# Altium PCB ClockPCB.PcbDoc (part 1 of 2)
Units mm, origin at the board's own origin, x right, y up, seen from the top; angles counter-clockwise.
Board outline 90 x 40 mm, 4 copper layers (Top Layer, L2, L3, Bottom Layer), stack 1.564 mm thick; 138 components, 106 nets, 450 pads, 188 vias.
Unrouted connection lines stored in the file: 60.
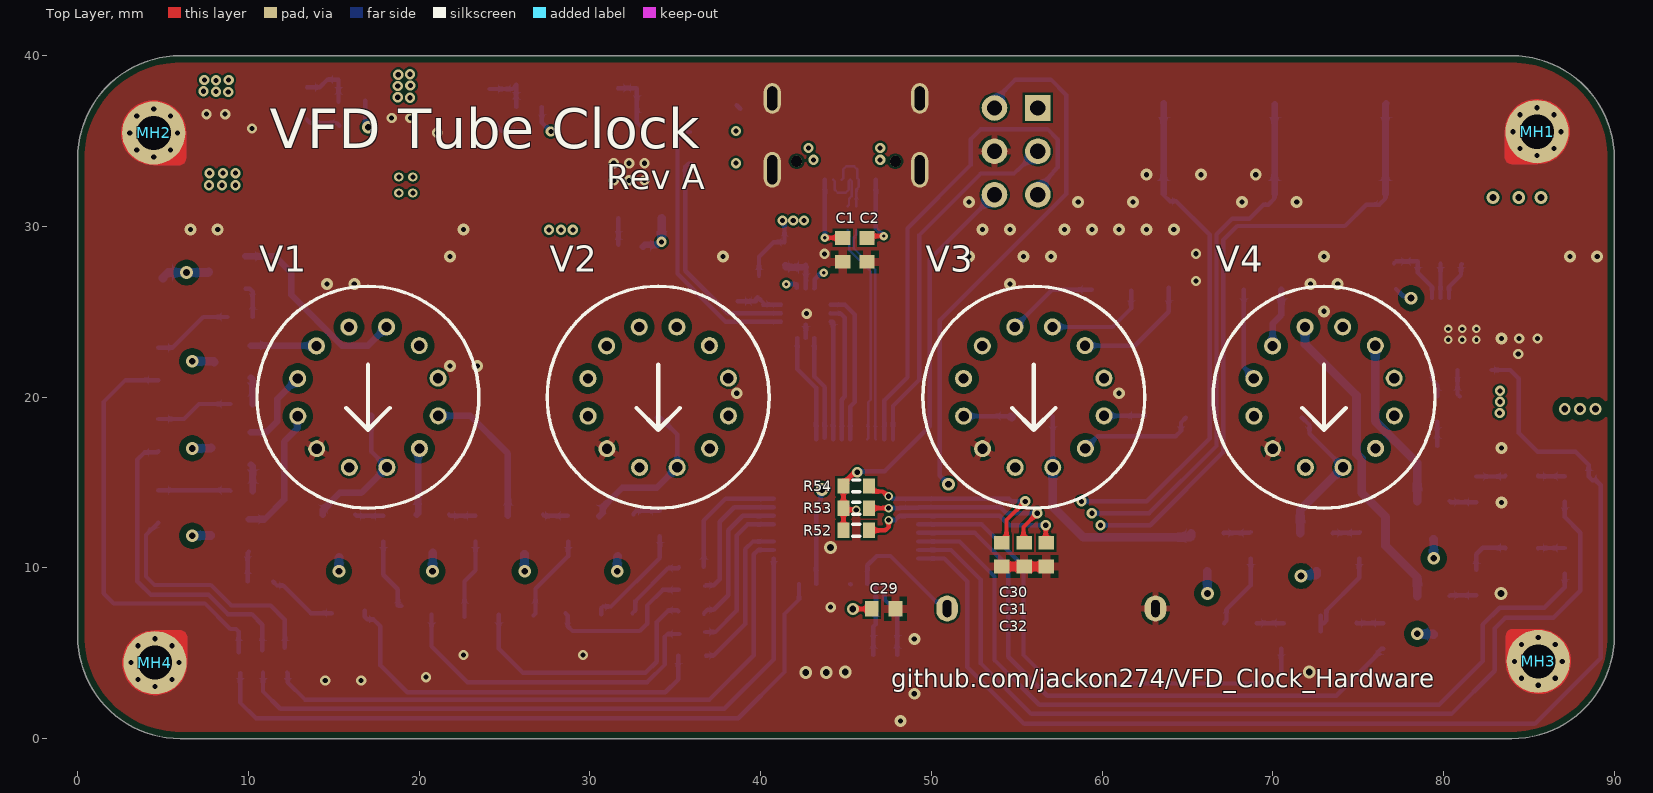
[diagram p0: Top Layer view]
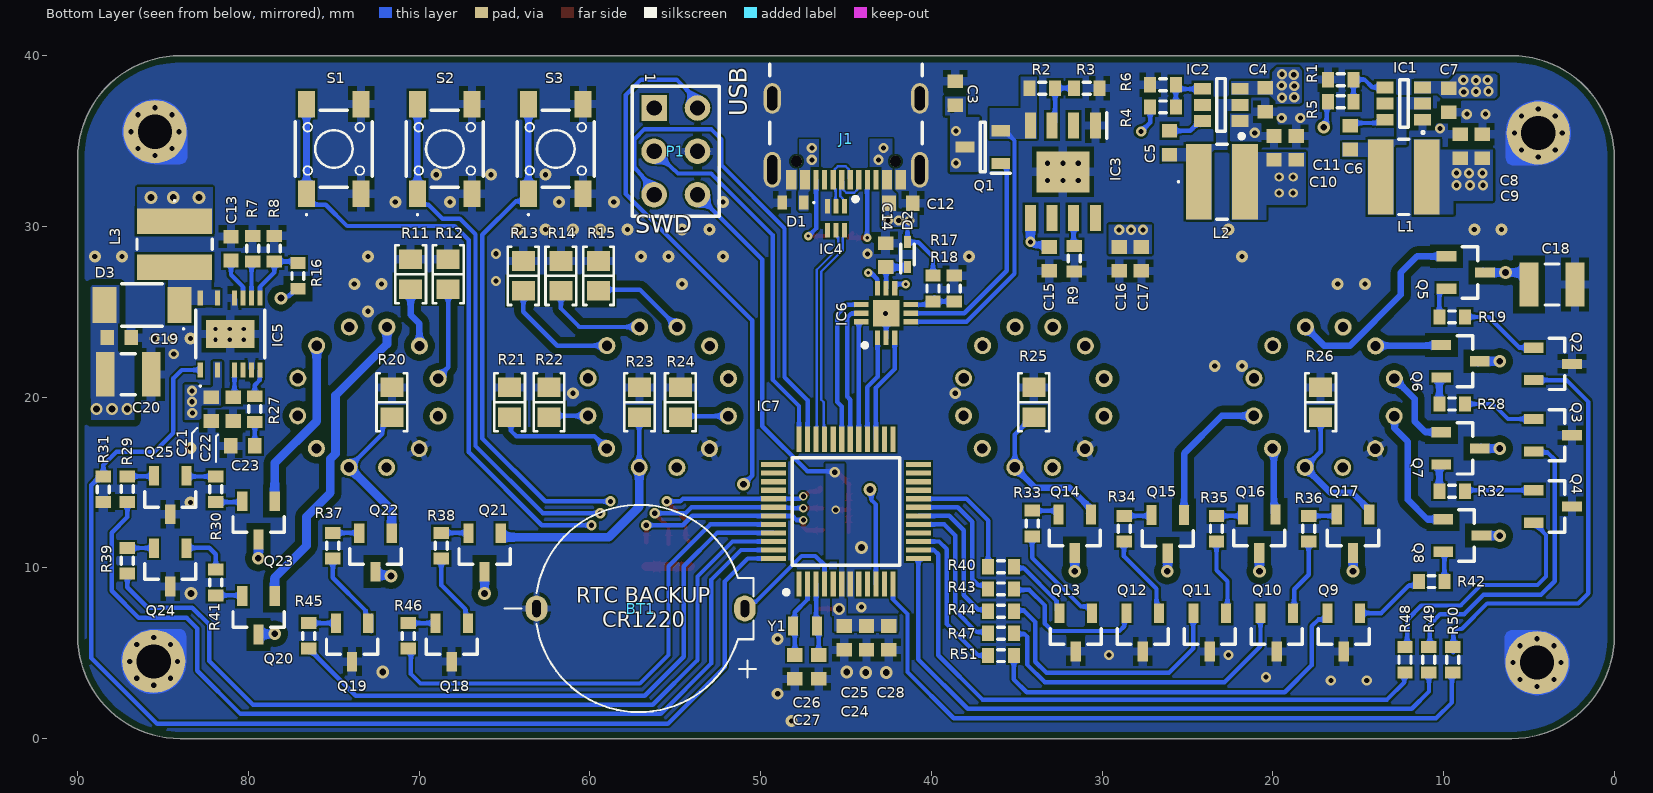
[diagram p1: Bottom Layer view, seen from below]
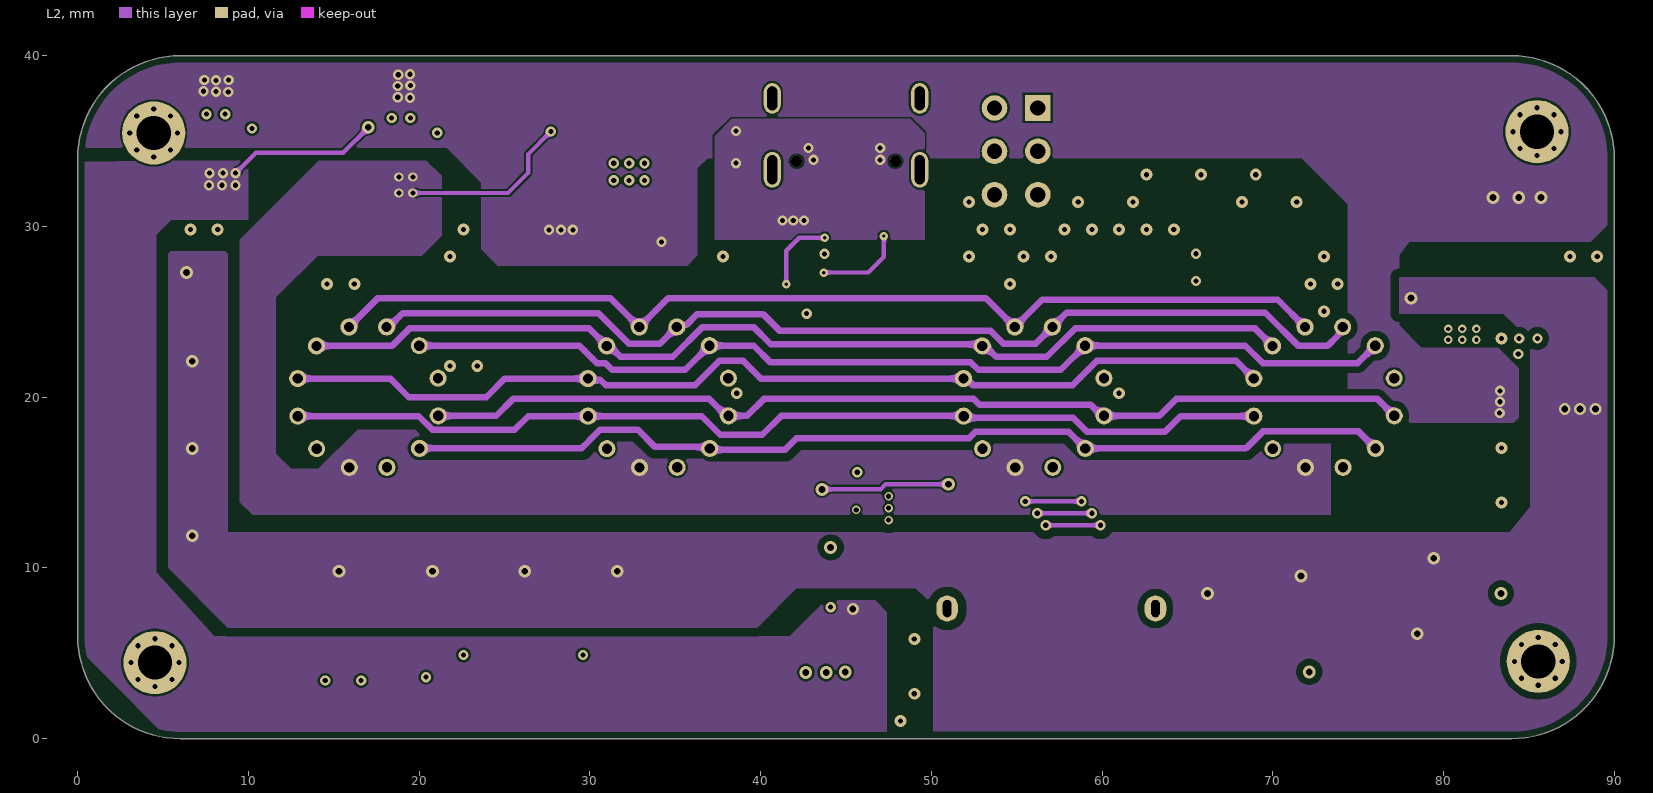
[diagram p2: L2]
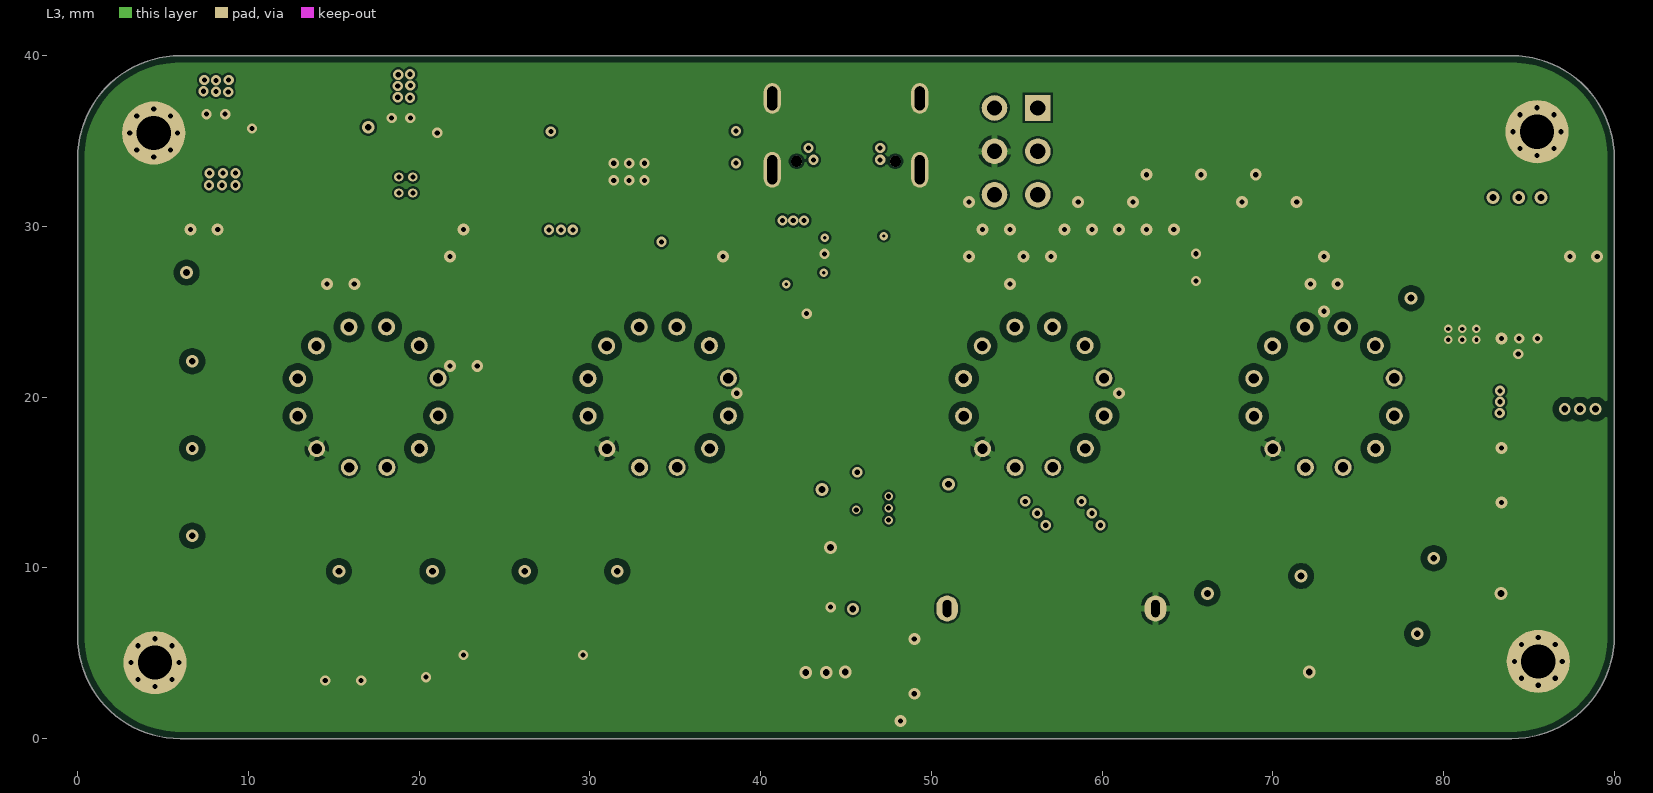
[diagram p3: L3]

## Layer stack, top to bottom
Top Solder: solder mask 0.0102, Solder Resist, Dk 3.8
Top Layer: signal copper 0.035
Dielectric 2: prepreg 0.0994, PP-006, Dk 4.1
L2: signal copper 0.0152
Dielectric 1: dielectric 1.265, FR-4, Dk 4.6
L3: signal copper 0.0152
Dielectric 3: prepreg 0.0994, PP-006, Dk 4.1
Bottom Layer: signal copper 0.035
Bottom Solder: solder mask 0.0102, Solder Resist, Dk 3.8

## Board outline
0,6 0,34 cw(c6,34) 6,40 84,40 cw(c84,34) 90,34 90,6 cw(c84,6) 84,0 6,0 cw(c6,6)

## Design rules (kind name [scope] priority, off if disabled: settings)
BoardOutlineClearance [All] p1: gap=0.254 ignorepadtopadclearanceinfootprint=FALSE except(0: Arc-SplitContinuation Track-SplitContinuation SMDPad-SplitContinuation THPad-SplitContinuation Via-SplitContinuation Fill-SplitContinuation Poly-SplitContinuation Region-SplitContinuation Text-SplitContinuation; 0.4: Poly-OutlineEdge)
Clearance HV_GND [InNet('+50V') vs InNet('GND')] p1: gap=0.381 ignorepadtopadclearanceinfootprint=TRUE except(0: Arc-Hole Track-Hole SMDPad-Hole THPad-Hole Via-Hole Fill-Hole Poly-Hole Region-Hole Text-Hole; 0.254: Arc-Text Track-Text SMDPad-Text THPad-Text Via-Text Fill-Text Poly-Text Region-Text Text-Text)
Clearance HV_to_PwrNets [InNet('Grid_1') Or InNet('Grid_2') Or InNet('Grid_3') Or InNet('Grid_4') Or InNet('Anode_A') Or InNet('Anode_B') Or InNet('Anode_C')  Or InNet('Anode_D') Or  InNet('Anode_E') Or InNet('Anode_F')  Or InNet('Anode_G') Or InNet('Anode_DP') vs InNet('+1V') Or InNet('+3V3')] p2: gap=0.508 ignorepadtopadclearanceinfootprint=TRUE except(0: Arc-Hole Track-Hole SMDPad-Hole THPad-Hole Via-Hole Fill-Hole Poly-Hole Region-Hole Text-Hole; 0.127: THPad-Fill THPad-Poly THPad-Region Via-Fill Via-Poly Via-Region Fill-Fill Fill-Poly Fill-Region Poly-Poly Poly-Region Region-Region; 0.254: Arc-Text Track-Text SMDPad-Text THPad-Text Via-Text Fill-Text Poly-Text Region-Text Text-Text)
Clearance HV_toAllTraces [InNet('+50V') vs Not InNet('+50V')] p3: gap=0.508 ignorepadtopadclearanceinfootprint=TRUE except(0: Arc-Hole Track-Hole SMDPad-Hole THPad-Hole Via-Hole Fill-Hole Poly-Hole Region-Hole Text-Hole; 0.254: Arc-Text Track-Text SMDPad-SMDPad SMDPad-Text THPad-Text Via-Text Fill-Text Poly-Text Region-Text Text-Text; 0.635: Arc-Arc Arc-Track Arc-SMDPad Arc-THPad Arc-Via Track-Track Track-SMDPad Track-THPad Track-Via SMDPad-THPad SMDPad-Via THPad-THPad THPad-Via Via-Via)
Clearance AnodeVoltage [InNet('Anode_A')   Or InNet('Anode_B')  Or InNet('Anode_C')  Or InNet('Anode_D')   Or InNet('Anode_E')  Or InNet('Anode_F')  Or InNet('Anode_G')   Or InNet('Anode_DP') vs Not (InNet('Anode_A')   Or InNet('Anode_B')  Or InNet('Anode_C')  Or InNet('Anode_D')   Or InNet('Anode_E')  Or InNet('Anode_F')  Or InNet('Anode_G')   Or InNet('Anode_DP')    )] p4: gap=0.381 ignorepadtopadclearanceinfootprint=TRUE except(0: Arc-Hole Track-Hole SMDPad-Hole THPad-Hole Via-Hole Fill-Hole Poly-Hole Region-Hole Text-Hole; 0.254: Arc-Text Track-Text SMDPad-Text THPad-THPad THPad-Text Via-Text Fill-Text Poly-Text Region-Text Text-Text; 0.305: Arc-THPad Track-THPad)
Clearance MCU [InComponent('IC7') vs IsTeardrop] p5: gap=0.178 ignorepadtopadclearanceinfootprint=TRUE
Clearance [All] p6: gap=0.127 ignorepadtopadclearanceinfootprint=TRUE except(0: Arc-Hole Track-Hole SMDPad-Hole THPad-Hole Via-Hole Fill-Hole Poly-Hole Region-Hole Text-Hole; 0.254: Arc-Text Track-Text SMDPad-Text THPad-Text Via-Text Fill-Text Poly-Text Region-Text Text-Text)
DiffPairsRouting USB_2 [InDifferentialPair('USB_MCU')] p1: maxlimit=0.127 minlimit=0.127 mostfreqgap=0.127 toplayer_minwidth=0.14 toplayer_maxwidth=0.14 toplayer_prefwidth=0.14 bottomlayer_minwidth=0.14 bottomlayer_maxwidth=0.14 bottomlayer_prefwidth=0.14 impedanceprofiledriven=TRUE impedanceprofileid={8D7F8B74-E079-47DF-BA4C-9728C9DC5000} impedanceprofilevalue=90.000000 maxuncoupledlength=12.7
DiffPairsRouting USB_1 [InDifferentialPair('USB')] p2: maxlimit=0.127 minlimit=0.127 mostfreqgap=0.127 toplayer_minwidth=0.14 toplayer_maxwidth=0.14 toplayer_prefwidth=0.14 bottomlayer_minwidth=0.14 bottomlayer_maxwidth=0.14 bottomlayer_prefwidth=0.14 impedanceprofiledriven=TRUE impedanceprofileid={8D7F8B74-E079-47DF-BA4C-9728C9DC5000} impedanceprofilevalue=90.000000 maxuncoupledlength=12.7
Height [All] p1: minheight=0 maxheight=70 prefheight=12.7
HoleToHoleClearance MountingHoles [InComponent('MH1') Or InComponent('MH2') Or InComponent('MH3') Or InComponent('MH4')] p1: gap=0.203 allowstackedmicrovias=TRUE
HoleToHoleClearance [All] p2: gap=0.254 allowstackedmicrovias=TRUE
MinimumSolderMaskSliver [All] p1: minsoldermaskwidth=0.13
PolygonConnect GND_MountingHole [InNet('GND') And ( InComponent('MH1') Or  InComponent('MH2') Or  InComponent('MH3') Or InComponent('MH4') )] p1: connectstyle=Direct reliefconductorwidth=0.254 reliefentries=4 polygonreliefangle="90 Angle" airgapwidth=0.254
PolygonConnect GND_USB_Connector [InNet('GND') And InComponent('J1')] p2: connectstyle=Direct reliefconductorwidth=0.254 reliefentries=4 polygonreliefangle="90 Angle" airgapwidth=0.254
PolygonConnect GND_Via [All vs IsVia And InNet('GND')] p3: connectstyle=Direct reliefconductorwidth=0.254 reliefentries=4 polygonreliefangle="90 Angle" airgapwidth=0.254
PolygonConnect InternalPowerConnect [IsNamedPolygon('L2_VBUS') Or IsNamedPolygon('L2_50V') or IsNamedPolygon('L2_3V3') Or IsNamedPolygon('L2_VBUS_C') Or IsNamedPolygon('L2_1V') Or IsNamedPolygon('L2_VBUS_RAW')] p4: connectstyle=Direct reliefconductorwidth=0.254 reliefentries=4 polygonreliefangle="90 Angle" airgapwidth=0.254
PolygonConnect Power_DirectINConnect [IsNamedPolygon('L4_3V3_Buck_IN') Or   IsNamedPolygon('L4_1V_Buck_IN')      Or   IsNamedPolygon('L4_50V_Boost_IN')    Or  IsNamedPolygon('L4_USB_BUS_VOLTAGE') Or  IsNamedPolygon('L4_USB_C_PWR_1')     Or  IsNamedPolygon('L4_USB_C_PWR_2')     Or  IsNamedPolygon('L4_MOSFET_VBUS')     Or IsNamedPolygon('L4_VBUS_CAP')        Or IsNamedPolygon('L1_SwitchPullup_3V3') Or IsNamedPolygon('L4_3V3_MCU')] p5: connectstyle=Direct reliefconductorwidth=0.254 reliefentries=4 polygonreliefangle="90 Angle" airgapwidth=0.254
PolygonConnect Power_DirectGNDConnect [((IsPad) And InNet('GND') And (InComponent('IC2') Or InComponent('IC4')) ) Or (InComponentClass('SMPS_InputCap') And InNet('GND')) Or (InComponentClass('SMPS_OutputCap') And InNet('GND'))   Or ((IsPad) And InNet('GND') And (InComponent('IC7')) )] p6: connectstyle=Direct reliefconductorwidth=0.254 reliefentries=4 polygonreliefangle="90 Angle" airgapwidth=0.254
PolygonConnect GNDConnect [InNet('GND')] p7: thpad.connectstyle=Relief thpad.reliefconductorwidth=0.381 thpad.reliefentries=4 thpad.polygonreliefangle="90 Angle" thpad.airgapwidth=0.203 smdpad.connectstyle=Relief smdpad.reliefconductorwidth=0.508 smdpad.reliefentries=4 smdpad.polygonreliefangle="90 Angle" smdpad.airgapwidth=0.254 via.connectstyle=Relief via.reliefconductorwidth=0.254 via.reliefentries=4 via.polygonreliefangle="90 Angle" via.airgapwidth=0.254
PolygonConnect SMPS_HotSwitchingPolygon [IsNamedPolygon('SMPS_SWITCHING') Or IsNamedPolygon('SMPS_OUT_50V') Or IsNamedPolygon('SMPS_VBUS_INDUCTOR') Or IsNamedPolygon('L4_3V3_Buck_SW') Or IsNamedPolygon('L4_3V3_Buck_OUT') Or IsNamedPolygon('L4_1V_Buck_SW') Or IsNamedPolygon('L4_1V_Buck_OUT')] p8: connectstyle=Direct reliefconductorwidth=0.254 reliefentries=4 polygonreliefangle="90 Angle" airgapwidth=0.254
PolygonConnect PowerSupplyPolygn [InNet('+1V') or InNet('NetC16_2') or InNet('NetC7_1') or InNet('+3V3')] p9: thpad.connectstyle=Relief thpad.reliefconductorwidth=0.635 thpad.reliefentries=4 thpad.polygonreliefangle="90 Angle" thpad.airgapwidth=0.152 smdpad.connectstyle=Relief smdpad.reliefconductorwidth=0.381 smdpad.reliefentries=4 smdpad.polygonreliefangle="90 Angle" smdpad.airgapwidth=0.254 via.connectstyle=Relief via.reliefconductorwidth=0.254 via.reliefentries=4 via.polygonreliefangle="90 Angle" via.airgapwidth=0.254
PolygonConnect [All] p10: connectstyle=Relief reliefconductorwidth=0.254 reliefentries=4 polygonreliefangle="90 Angle" airgapwidth=0.203
RoutingVias [All] p1: holewidth=0.711 width=1.27 viastyle="Through Hole" minholewidth=0.711 minwidth=1.27 maxholewidth=0.711 maxwidth=1.27
SilkToSilkClearance [All] p1: silktosilkclearance=0.2
SolderMaskExpansion [All] p1: expansion=0.102 istentingtop=FALSE
Width USB [InNet('USB_N') Or InNet('USB_P')] p1: maxlimit=0.254 minlimit=0.127 preferedwidth=0.254 midlayer1_minwidth=0.254 midlayer2_minwidth=0.254 minimp=50.000000 maximp=50.000000 favimp=50.000000
Width RoomWidth [OnLayer('Bottom Layer') And ( WithinRoom('MCURoom') or WithinRoom('RoomECMF') or WithinRoom('RoomUSBPort') or WithinRoom('RoomTCPP') )] p2: maxlimit=0.508 minlimit=0.127 preferedwidth=0.127 midlayer1_maxwidth=0.381 midlayer2_maxwidth=0.381 minimp=50.000000 maximp=50.000000 favimp=50.000000
Width [All] p3: maxlimit=0.508 minlimit=0.254 preferedwidth=0.381 midlayer2_maxwidth=0.254 midlayer2_prefwidth=0.254 minimp=50.000000 maximp=50.000000 favimp=50.000000
25 further rules are at their usual default settings.

## Classes and differential pairs
component class U_USB: C1 C2 C3 C12 C14 D1 D2 IC4 IC6 J1 Q1 R17 R18
component class U_Tubes: Q2 Q3 Q4 Q5 Q6 Q7 Q8 Q9 Q10 Q11 Q12 Q13 Q14 Q15 Q16 Q17 Q18 Q19 Q20 Q21 Q22 Q23 Q24 Q25 R11 R12 R13 R14 R15 R19 R20 R21 R22 R23 R24 R25 R26 R28 R29 R30 R32 R33 R34 R35 R36 R37 R38 R39 R40 R41 R42 R43 R44 R45 R46 R47 R48 R49 R50 R51 V1 V2 V3 V4
component class U_power: BT1 C4 C5 C6 C7 C8 C9 C10 C11 C13 C15 C16 C17 C18 C19 C20 C21 C22 C23 D3 IC1 IC2 IC3 IC5 L1 L2 L3 R1 R2 R3 R4 R5 R6 R7 R8 R9 R16 R27 R31
net class USB: USB_N USB_P
component class main: C24 C25 C26 C27 C28 C29 C30 C31 C32 IC7 MH1 MH2 MH3 MH4 P1 R52 R53 R54 S1 S2 S3 Y1
differential pair USB_MCU: +USB_MCU_P -USB_MCU_N
differential pair USB: +USB_P -USB_N

## Components (designator, comment, footprint, x,y, rotation, side; value= is the part's Value field where it differs from the comment)
BT1 "120591-1" BR1220_Horizontal 57.127,7.62 r0 bottom
C1 "330pF" 1608[0603] 44.806,28.626 r90 top (schematic designator C26)
C2 "330pF" 1608[0603] 46.228,28.626 r90 top (schematic designator C27)
C3 "1u" 1608[0603] 38.6,37.8 r270 bottom value=100pF (schematic designator C23)
C4 "100n" 1608[0603] 20.447,37.414 r90 bottom value=100pF (schematic designator C19)
C5 "100n" 1608[0603] 26.052,34.9 r270 bottom value=100pF (schematic designator C16)
C6 "100n" 1608[0603] 15.469,35.204 r270 bottom value=100pF (schematic designator C7)
C7 "100n" 1608[0603] 9.703,37.389 r90 bottom value=100pF (schematic designator C8)
C8 "100n" 1608[0603] 9.027,34.7 r270 bottom value=100pF (schematic designator C9)
C9 "10u" 1608[0603] 7.727,34.7 r270 bottom value=100pF (schematic designator C10)
C10 "10u" 1608[0603] 19.933,34.6 r270 bottom value=100pF (schematic designator C21)
C11 "100n" 1608[0603] 18.633,34.6 r270 bottom value=100pF (schematic designator C20)
C12 "100n" 1608[0603] 41.783,31.369 r0 bottom value=100pF (schematic designator C22)
C13 "10nF" 1608[0603] 81.026,28.702 r270 bottom value=100pF (schematic designator C17)
C14 "100nF 50V X7R" 1608[0603] 42.672,28.321 r270 bottom value=100nF (schematic designator C32)
C15 "100n" 1608[0603] 33.1,28.1 r90 bottom value=100pF (schematic designator C28)
C16 "22u" 1608[0603] 29,28.1 r90 bottom value=100pF (schematic designator C30)
C17 "10u" 1608[0603] 27.7,28.1 r90 bottom value=100pF (schematic designator C29)
C18 "2.2u" C1210 3.65,26.6 r0 bottom value=100pF (schematic designator C13)
C19 "68n" 1608[0603] 87.568,23.495 r0 bottom value=100pF (schematic designator C12)
C20 "2.2u" C1210 87.042,21.336 r0 bottom value=100pF (schematic designator C14)
C21 "4.7u" 1608[0603] 82.169,19.304 r90 bottom value=100pF (schematic designator C11)
C22 "1uF" 1608[0603] 80.899,19.304 r90 bottom value=100pF (schematic designator C15)
C23 "2.2nF" 1608[0603] 80.329,17.145 r180 bottom value=100pF (schematic designator C18)
C24 "100n" 1608[0603] 45.1,5.9 r90 bottom value=100pF (schematic designator C3)
C25 "10u" 1608[0603] 43.8,5.9 r90 bottom value=100pF (schematic designator C6)
C26 "15pF" 1608[0603] 48,4.2 r90 bottom value=100pF (schematic designator C1)
C27 "15pF" 1608[0603] 46.6,4.2 r90 bottom value=100pF (schematic designator C2)
C28 "100n" 1608[0603] 42.5,5.9 r90 bottom value=100pF
C29 "47u" 1608[0603] 47.2,7.6 r180 top value=100pF
C30 "100n" 1608[0603] 56.732,10.78 r90 top value=100pF
C31 "100n" 1608[0603] 55.432,10.78 r90 top value=100pF
C32 "100n" 1608[0603] 54.132,10.78 r90 top value=100pF
D1 "ESDA25P35" ESDA25P351U1M 48.1,31.4 r180 bottom (schematic designator D2)
D2 "BAT54KFILM" SODFL1608X70N 41.402,28.358 r90 bottom (schematic designator D3)
D3 "PMEG6030EP" PMEG6030EP115 86.233,25.4 r0 bottom (schematic designator D1)
IC1 "AP62250WU-7" TSOT26 12.327,37.2 r0 bottom (schematic designator IC2)
IC2 "AP62250WU-7" TSOT26 23.029,37.114 r0 bottom (schematic designator IC4)
IC3 "TPS259620DDAR" SOIC127P600X170-9N 32.3,33.2 r270 bottom (schematic designator IC5)
IC4 "ECMF02-2AMX6" SON50P150X170X55-6N-D 45.593,30.48 r270 bottom (schematic designator IC6)
IC5 "LT8364EMSE" LT8364EMSEPBF 81.058,23.702 r180 bottom (schematic designator IC3)
IC6 "TCPP01-M12" QFN50P300X300X100-13N-D 42.647,24.917 r90 bottom (schematic designator IC7)
IC7 "STM32G0B1CBT6" QFP50P900X900X160-48N 45,13.3 r90 bottom (schematic designator IC1)
J1 "USB4105-GF-A" GCT_USB4105-GF-A 45,37.5 r0 bottom
L1 "2.2u" BWVS004040182R2M00 12.327,32.9 r270 bottom value=10mH
L2 "1u" BWVS004040182R2M00 22.979,32.618 r270 bottom value=10mH (schematic designator L3)
L3 "3.3uH" BWVS004040182R2M00 84.328,28.956 r0 bottom (schematic designator L2)
MH1 "HOLE 2mm" Hole 85.5,35.5 r0 top locked (schematic designator MH3)
MH2 "HOLE 2mm" Hole 4.5,35.5 r90 top locked
MH3 "HOLE 2mm" Hole 85.5,4.5 r270 top locked (schematic designator MH4)
MH4 "HOLE 2mm" Hole 4.5,4.5 r180 top locked (schematic designator MH1)
P1 "Header 3X2" HDR2X3 56.24,36.94 r270 bottom
Q1 "DMG6968UQ-7" SOT96P240X110-3N 36.982,34.646 r0 bottom (schematic designator Q25)
Q2 "MMBTA42" SOT-23_N 3.6,21.95 r180 bottom (schematic designator Q6)
Q3 "MMBTA42" SOT-23_N 3.6,17.775 r180 bottom (schematic designator Q15)
Q4 "MMBTA42" SOT-23_N 3.6,13.6 r180 bottom (schematic designator Q10)
Q5 "MMBTA92" SOT-23B_N 8.7,27.3 r180 bottom (schematic designator Q1)
Q6 "MMBTA92" SOT-23B_N 9,22.1 r180 bottom (schematic designator Q11)
Q7 "MMBTA92" SOT-23B_N 9,17 r180 bottom (schematic designator Q5)
Q8 "MMBTA92" SOT-23B_N 8.9,11.9 r180 bottom (schematic designator Q4)
Q9 "MMBTA42" SOT-23_N 15.841,6.226 r270 bottom
Q10 "MMBTA42" SOT-23_N 19.766,6.226 r270 bottom (schematic designator Q22)
Q11 "MMBTA42" SOT-23_N 23.691,6.226 r270 bottom (schematic designator Q8)
Q12 "MMBTA42" SOT-23_N 27.616,6.226 r270 bottom (schematic designator Q17)
Q13 "MMBTA42" SOT-23_N 31.541,6.226 r270 bottom (schematic designator Q23)
Q14 "MMBTA92" SOT-23B_N 31.6,12 r270 bottom (schematic designator Q20)
Q15 "MMBTA92" SOT-23B_N 26.15,11.975 r270 bottom (schematic designator Q13)
Q16 "MMBTA92" SOT-23B_N 20.8,12 r270 bottom (schematic designator Q3)
Q17 "MMBTA92" SOT-23B_N 15.3,12 r270 bottom (schematic designator Q19)
Q18 "MMBTA42" SOT-23_N 68.097,5.636 r270 bottom (schematic designator Q24)
Q19 "MMBTA42" SOT-23_N 73.927,5.636 r270 bottom (schematic designator Q18)
Q20 "MMBTA92" SOT-23B_N 79.407,7.226 r270 bottom (schematic designator Q12)
Q21 "MMBTA92" SOT-23B_N 66.167,10.91 r270 bottom
Q22 "MMBTA92" SOT-23B_N 72.561,10.91 r270 bottom (schematic designator Q14)
Q23 "MMBTA92" SOT-23B_N 79.407,12.79 r270 bottom (schematic designator Q2)
Q24 "MMBTA42" SOT-23_N 84.582,10.033 r270 bottom (schematic designator Q16)
Q25 "MMBTA42" SOT-23_N 84.582,14.264 r270 bottom (schematic designator Q7)
R1 "10k" J1-0603 16.027,38.6 r180 bottom value=1K (schematic designator R38)
R2 "160k" J1-0603 33.5,38.1 r0 bottom value=1K (schematic designator R46)
R3 "68k" J1-0603 30.9,38.1 r0 bottom value=1K (schematic designator R49)
R4 "2k5" J1-0603 26.433,37 r0 bottom value=1K (schematic designator R44)
R5 "31k6" J1-0603 16.027,37.3 r0 bottom value=1K (schematic designator R37)
R6 "10k" J1-0603 26.433,38.3 r180 bottom value=1K (schematic designator R45)
R7 "20k" J1-0603 79.756,28.702 r270 bottom value=1K (schematic designator R43)
R8 "34.8k" J1-0603 78.486,28.702 r270 bottom value=1K (schematic designator R40)
R9 "???" J1-0603 31.623,28.118 r90 bottom value=1K (schematic designator R51)
R11 "330k" "RES 0805_2012" 70.5,27.2 r270 bottom value=1K (schematic designator R16)
R12 "330k" "RES 0805_2012" 68.3,27.2 r270 bottom value=1K (schematic designator R5)
R13 "330k" "RES 0805_2012" 63.9,27.1 r270 bottom value=1K (schematic designator R2)
R14 "330k" "RES 0805_2012" 61.7,27.1 r270 bottom value=1K (schematic designator R1)
R15 "330k" "RES 0805_2012" 59.5,27.1 r270 bottom value=1K (schematic designator R17)
R16 "1M" J1-0603 77.1,27.1 r270 bottom value=1K (schematic designator R39)
R17 "10k" J1-0603 39.903,26.365 r90 bottom value=1K (schematic designator R47)
R18 "1.1k" J1-0603 38.659,26.365 r270 bottom value=1K (schematic designator R48)
R19 "100k" J1-0603 9.5,24.7 r0 bottom value=1K (schematic designator R6)
R20 "330k" "RES 0805_2012" 71.6,19.7 r270 bottom value=1K (schematic designator R19)
R21 "330k" "RES 0805_2012" 64.7,19.7 r270 bottom value=1K (schematic designator R3)
R22 "330k" "RES 0805_2012" 62.4,19.7 r270 bottom value=1K (schematic designator R18)
R23 "330k" "RES 0805_2012" 57.1,19.7 r270 bottom value=1K (schematic designator R30)
R24 "330k" "RES 0805_2012" 54.7,19.7 r270 bottom value=1K (schematic designator R4)
R25 "330k" "RES 0805_2012" 34,19.7 r270 bottom value=1K (schematic designator R29)
R26 "330k" "RES 0805_2012" 17.2,19.7 r270 bottom value=1K (schematic designator R28)
R27 "36.5k" J1-0603 79.629,19.304 r90 bottom value=1K (schematic designator R42)
R28 "100k" J1-0603 9.5,19.6 r0 bottom value=1K (schematic designator R20)
R29 "100k" J1-0603 87.095,14.617 r90 bottom value=1K (schematic designator R12)
R30 "100k" J1-0603 81.915,14.605 r270 bottom value=1K (schematic designator R7)
R31 "10k" J1-0603 88.5,14.6 r90 bottom value=1K (schematic designator R41)
R32 "100k" J1-0603 9.5,14.5 r0 bottom value=1K (schematic designator R10)
R33 "100k" J1-0603 34.1,12.6 r90 bottom value=1K (schematic designator R32)
R34 "100k" J1-0603 28.7,12.3 r90 bottom value=1K (schematic designator R22)
R35 "100k" J1-0603 23.3,12.3 r90 bottom value=1K (schematic designator R8)
R36 "100k" J1-0603 17.9,12.3 r90 bottom value=1K (schematic designator R31)
R37 "100k" J1-0603 75.057,11.303 r90 bottom value=1K (schematic designator R23)
R38 "100k" J1-0603 68.707,11.303 r90 bottom value=1K (schematic designator R33)
R39 "100k" J1-0603 87.095,10.414 r90 bottom value=1K (schematic designator R25)
R40 "100k" J1-0603 35.921,10.068 r180 bottom value=1K (schematic designator R35)
R41 "100k" J1-0603 81.915,9.144 r270 bottom value=1K (schematic designator R21)
R42 "100k" J1-0603 10.7,9.2 r180 bottom value=1K (schematic designator R9)
R43 "100k" J1-0603 35.921,8.768 r180 bottom value=1K (schematic designator R26)
R44 "100k" J1-0603 35.921,7.468 r180 bottom value=1K (schematic designator R13)
R45 "100k" J1-0603 76.467,6.017 r90 bottom value=1K (schematic designator R27)
R46 "100k" J1-0603 70.637,6.017 r90 bottom value=1K (schematic designator R36)
R47 "100k" J1-0603 35.921,6.168 r180 bottom value=1K (schematic designator R34)
R48 "100k" J1-0603 12.257,4.626 r90 bottom value=1K (schematic designator R15)
R49 "100k" J1-0603 10.857,4.626 r90 bottom value=1K (schematic designator R24)
R50 "100k" J1-0603 9.457,4.626 r90 bottom value=1K (schematic designator R11)
R51 "100k" J1-0603 35.921,4.868 r180 bottom value=1K (schematic designator R14)
R52 "10k" J1-0603 45.6,12.2 r180 top value=1K
R53 "10k" J1-0603 45.6,13.5 r180 top value=1K
R54 "10k" J1-0603 45.6,14.8 r180 top value=1K
S1 "PTS647SK70SMTR2N_LFS" PTS647SK70SMTR2NLFS 75,34.544 r90 bottom
S2 "PTS647SK70SMTR2N_LFS" PTS647SK70SMTR2NLFS 68.5,34.544 r90 bottom
S3 "PTS647SK70SMTR2N_LFS" PTS647SK70SMTR2NLFS 62,34.544 r90 bottom
V1 "IV-6" IV-6 17,20 r0 top
V2 "IV-6" IV-6 34,20 r0 top
V3 "IV-6" IV-6 56,20 r0 top
V4 "IV-6" IV-6 73,20 r0 top
Y1 "32.768kHz" ABS06N32768kHzT 47.4,6.6 r180 bottom

## Footprints (in the part's own frame and the unit in brackets; to place one, negate y for a bottom-side part, rotate by r counter-clockwise, add the part's x,y. Pads: shape width x height; smd on the part's side, far side on the other; paste and mask are expansions set on the pad)
1608[0603] [mm] "Chip Capacitor, Body 1.6x0.8mm, IPC High Density"
  rect 0.8x0.9 smd: 1(-0.7,0) 2(0.7,0)
  body extent -0.87,-0.48 0.87,0.48, height 1.3
ABS06N32768kHzT [mm]
  rect 0.6x1.1 smd: 1(-0.7,0) 2(0.7,0)
  body extent -1,-0.61 0.99,0.6, height 0.61
BR1220_Horizontal [mm]
  rrect100% 1.27x1.524 hole 1 slot 0.5 at 0 deg paste-1.524 mask+0: 1(6,0) 2(-6.2,0)
  silkscreen extent -6.85,-6.08 7.87,6.07
BWVS004040182R2M00 [mm]
  rect 4.4x1.5 smd: 1(0,-1.35) 2(0,1.35)
  silkscreen extent -2.2,-0.3 2.2,0.3, body extent -2,-2 2,2, height 2.1
C1210 [mm] "Chip Capacitor, Body 3.2x2.5mm, IPC High Density"
  rect 1.1x2.6 smd: 1(-1.35,0) 2(1.35,0)
  silkscreen extent -0.4,-1.2 0.4,1.2, body extent -1.7,-1.35 1.7,1.35, height 1.3
ESDA25P351U1M [mm]
  rect 0.55x0.8 smd: 1(0.625,0) 2(-0.625,0)
  silkscreen extent 1.17,-0.05 1.27,0.05, body extent -0.8,-0.5 0.8,0.5, height 0.57
GCT_USB4105-GF-A [mm]
  rect 0.6x1.15 smd mask+0.05: A1_B12(-3.2,4.755) A4_B9(-2.4,4.755) B1_A12(3.2,4.755) B4_A9(2.4,4.755)
  rect 0.3x1.15 smd mask+0.05: A5(-1.25,4.755) A6(-0.25,4.755) A7(0.25,4.755) A8(1.25,4.755) B5(1.75,4.755) B6(0.75,4.755) B7(-0.75,4.755) B8(-1.75,4.755)
  oval 1x2.1 hole 0.6 slot 1.7 at 90 deg: SH1(-4.32,4.18) SH2(4.32,4.18)
  oval 1x1.8 hole 0.6 slot 1.4 at 90 deg: SH3(-4.32,0) SH4(4.32,0)
  round 0.65 hole 0.65 unplated: ""(-2.89,3.68) ""(2.89,3.68)
  silkscreen extent -4.47,-2 4.47,2.65, body extent -4.47,-2.6 4.47,5.11, height 3.31
HDR2X3 [mm] "Connector; Header; 3x2 Position"
  rect 1.5x1.5 hole 0.9: 1(0,0)
  round 1.5 hole 0.9: 2(0,2.54) 3(2.54,0) 4(2.54,2.54) 5(5.08,0) 6(5.08,2.54)
  silkscreen extent -1.27,-1.27 6.35,3.81
Hole [mm]
  round 3.7 hole 2: 0(-0.025,0.05)
  Top Layer region: -1.913,0.054 -1.706,0.917 -1.13,1.591 -0.31,1.931 0.574,1.861 1.33,1.398 1.794,0.641 1.863,-0.243 1.524,-1.063 0.849,-1.639 -0.013,-1.846 -0.013,-1.846 -1.513,-1.846 -1.666,-1.815 -1.796,-1.729 -1.883,-1.599 -1.913,-1.446 -1.913,-1.446
  Bottom Layer region: -1.913,0.054 -1.706,0.917 -1.13,1.591 -0.31,1.931 0.574,1.861 1.33,1.398 1.794,0.641 1.863,-0.243 1.524,-1.063 0.849,-1.639 -0.013,-1.846 -0.013,-1.846 -1.513,-1.846 -1.666,-1.815 -1.796,-1.729 -1.883,-1.599 -1.913,-1.446 -1.913,-1.446
IV-6 [mm] "Vacuum Tube; 9 Leads"
  round 1 hole 0.6: 1(3.003,3.017) 2(1.092,4.115) 3(-1.112,4.11) 4(-3.017,3.003) 5(-4.115,1.092) 6(-4.11,-1.112) 7(-3.003,-3.017) 8(-1.092,-4.115) 9(1.112,-4.11) 10(3.017,-3.003) 11(4.115,-1.092) 12(4.11,1.112)
  silkscreen extent -6.5,-6.5 6.5,6.5
J1-0603 [mm] "Chip Resistor, Body 1.6x0.8mm, IPC High Density"
  rect 0.7x0.9 smd: 1(-0.75,0) 2(0.75,0)
  silkscreen extent -0.2,-0.35 0.2,0.35, body extent -0.85,-0.48 0.85,0.48, height 0.9
LT8364EMSEPBF [mm]
  rect 0.305x0.889 smd: 1(-1.761,-2.107) 3(-0.761,-2.107) 5(0.239,-2.107) 6(0.739,-2.107) 7(1.239,-2.107) 8(1.739,-2.107) 9(1.739,2.107) 10(1.239,2.107) 11(0.739,2.107) 12(0.239,2.107) 14(-0.761,2.107) 16(-1.761,2.107)
  rect 2.845x1.651 smd: 17(-0.011,0)
  silkscreen extent -2.02,-3.1 2.02,1.4
PMEG6030EP115 [mm]
  rect 1.4x2.1 smd: 1(-2.2,0) 2(2.2,0)
  silkscreen extent -2.48,-1.25 1.2,1.45, body extent -2.35,-1.3 2.35,1.3, height 1.07
PTS647SK70SMTR2NLFS [mm]
  rect 1.55x1 smd: 1(-2.625,1.6) 1(2.625,1.6) 4(-2.625,-1.6) 4(2.625,-1.6)
  silkscreen extent -3.9,-2.25 2.25,2.25, body extent -3.25,-2.25 3.25,2.25, height 7
QFN50P300X300X100-13N-D [mm]
  rect 0.85x0.3 smd: 1(-1.45,0.5) 2(-1.45,0) 3(-1.45,-0.5) 7(1.45,-0.5) 8(1.45,0) 9(1.45,0.5)
  rect 0.3x0.85 smd: 4(-0.5,-1.45) 5(0,-1.45) 6(0.5,-1.45) 10(0.5,1.45) 11(0,1.45) 12(-0.5,1.45)
  rect 1.55x1.55 smd: 13(0,0)
  silkscreen extent -2,1.13 -1.75,1.38, body extent -1.55,-1.55 1.55,1.55, height 1
QFP50P900X900X160-48N [mm]
  rect 1.475x0.3 smd: 1(-4.238,2.75) 2(-4.238,2.25) 3(-4.238,1.75) 4(-4.238,1.25) 5(-4.238,0.75) 6(-4.238,0.25) 7(-4.238,-0.25) 8(-4.238,-0.75) 9(-4.238,-1.25) 10(-4.238,-1.75) 11(-4.238,-2.25) 12(-4.238,-2.75) 25(4.238,-2.75) 26(4.238,-2.25) 27(4.238,-1.75) 28(4.238,-1.25) 29(4.238,-0.75) 30(4.238,-0.25) 31(4.238,0.25) 32(4.238,0.75) 33(4.238,1.25) 34(4.238,1.75) 35(4.238,2.25) 36(4.238,2.75)
  rect 0.3x1.475 smd: 13(-2.75,-4.238) 14(-2.25,-4.238) 15(-1.75,-4.238) 16(-1.25,-4.238) 17(-0.75,-4.238) 18(-0.25,-4.238) 19(0.25,-4.238) 20(0.75,-4.238) 21(1.25,-4.238) 22(1.75,-4.238) 23(2.25,-4.238) 24(2.75,-4.238) 37(2.75,4.238) 38(2.25,4.238) 39(1.75,4.238) 40(1.25,4.238) 41(0.75,4.238) 42(0.25,4.238) 43(-0.25,4.238) 44(-0.75,4.238) 45(-1.25,4.238) 46(-1.75,4.238) 47(-2.25,4.238) 48(-2.75,4.238)
  silkscreen extent -4.85,-3.15 3.15,3.63, body extent -4.5,-4.5 4.5,4.5, height 1.6
"RES 0805_2012" [mm] "Chip Resistor, 2-Leads, Body 2.00x1.25mm, IPC Medium Density"
  rect 1.15x1.35 smd: 1(-0.875,0) 2(0.875,0)
  silkscreen extent -1.7,-0.9 1.7,0.9, body extent -1,-0.62 1,0.63, height 0.6
SODFL1608X70N [mm]
  rect 0.7x0.42 smd: 1(-0.725,0) 2(0.725,0)
  silkscreen extent -1.07,-0.4 0.6,0.4, body extent -0.8,-0.4 0.8,0.4, height 0.7
SOIC127P600X170-9N [mm]
  rect 1.525x0.65 smd: 1(-2.712,1.905) 2(-2.712,0.635) 3(-2.712,-0.635) 4(-2.712,-1.905) 5(2.712,-1.905) 6(2.712,-0.635) 7(2.712,0.635) 8(2.712,1.905)
  rect 2.4x3.1 smd: 1(0,0)
  silkscreen extent -3.47,2.58 -1.95,2.58, body extent -3,-2.45 3,2.45, height 1.57
SON50P150X170X55-6N-D [mm]
  rect 0.85x0.3 smd: 1(-0.7,0.5) 2(-0.7,0) 3(-0.7,-0.5) 4(0.7,-0.5) 5(0.7,0) 6(0.7,0.5)
  silkscreen extent -1.25,1.02 -1,1.27, body extent -0.8,-0.85 0.8,0.85, height 0.55
SOT96P240X110-3N [mm]
  rect 1.1x0.65 smd: 1(-1.05,0.96) 2(-1.05,-0.96) 3(1.05,0)
  silkscreen extent -1.6,-1.45 0.15,1.54, body extent -1.2,-1.45 1.2,1.45, height 1.1
SOT-23_N [mm] "SOT23, 3-Leads, Body 2.9x1.3mm, Pitch 0.95mm, Lead Span 2.5mm, IPC Medium Density"
  rect 1.15x0.6 smd: 1(-1.125,0.95) 2(-1.125,-0.95) 3(1.125,0)
  silkscreen extent -0.2,-1.5 0.7,1.5, body extent -0.7,-1.5 0.7,1.5, height 1.1
SOT-23B_N [mm] "SOT23, 3-Leads, Body 2.9x1.3mm, Pitch 0.95mm, Lead Span 2.4mm, IPC Medium Density"
  rect 1.15x0.6 smd: 1(-1.125,0.95) 2(-1.125,-0.95) 3(1.125,0)
  silkscreen extent -0.2,-1.5 0.7,1.5, body extent -0.7,-1.5 0.7,1.5, height 1.14
TSOT26 [mm] "TSOT26, 6-Leads"
  rect 1x0.7 smd: 1(-1.1,0.95) 2(-1.1,0) 3(-1.1,-0.95) 4(1.1,-0.95) 5(1.1,0) 6(1.1,0.95)
  silkscreen extent -1.22,-1.4 0.25,1.79, body extent -0.9,-1.55 0.9,1.55, height 1.45

## Part data
BT1: "Battery", Manufacturer_Name="TE Connectivity", Mouser Part Number=571-1205911, Arrow Part Number=120591-1, Arrow Price/Stock=https://www.arrow.com/en/products/120591-1/te-connectivity?utm_currency=USD&region=nac, Datasheet Link=http://www.te.com/commerce/DocumentDelivery/DDEController?Action=srchrtrv&DocNm=120591&DocType=Customer+Drawing&DocLang=English&DocFormat=pdf&PartCntxt=120591-1, Manufacturer_Part_Number=120591-1, Mouser Price/Stock=https://www.mouser.co.uk/ProductDetail/TE-Connectivity/120591-1?qs=cB%252BprIo57OeZ1n1mnEiYEw%3D%3D
C1 C2 C3 C4 C5 C6 C7 C8 C9 C10 C11 C12 C13 C15 C16 C17 C18 C19 C20 C21 C22 C23 C24 C25 C26 C27 C28 C29 C30 C31 C32: library part Cap, "Capacitor", LatestRevisionDate=17-Jul-2002, LatestRevisionNote="Re-released for DXP Platform.", PackageDescription="Radial Cap, Thru-Hole; 2 Leads; 0.3 in Pin Spacing", PackageReference=RAD-0.3, Published=8-Jun-2000, Publisher="Altium Limited"
C14: library part Cap, "50 V X7R 100 nF capacitor", LatestRevisionDate=17-Jul-2002, LatestRevisionNote="Re-released for DXP Platform.", PackageDescription="Radial Cap, Thru-Hole; 2 Leads; 0.3 in Pin Spacing", PackageReference=RAD-0.3, Published=8-Jun-2000, Publisher="Altium Limited"
D1: library part ESDA25P35-1U1M, "TVS Diode (Uni-directional)", Manufacturer_Name=STMicroelectronics, Mouser Part Number=511-ESDA25P35-1U1M, Arrow Part Number=ESDA25P35-1U1M, Arrow Price/Stock=https://www.arrow.com/en/products/esda25p35-1u1m/stmicroelectronics?utm_currency=USD&region=europe, Datasheet Link=https://www.st.com/resource/en/datasheet/esda25p35-1u1m.pdf, Height=0.6mm, Manufacturer_Part_Number=ESDA25P35-1U1M, Mouser Price/Stock=https://www.mouser.co.uk/ProductDetail/STMicroelectronics/ESDA25P35-1U1M?qs=aVyJF2WnouQUWqgNP85ZrA%3D%3D
D2: "Diode", Manufacturer_Name=STMicroelectronics, Mouser Part Number=511-BAT54KFILM, Arrow Part Number=BAT54KFILM, Arrow Price/Stock=https://www.arrow.com/en/products/bat54kfilm/stmicroelectronics?region=europe, Datasheet Link=http://www.st.com/web/en/resource/technical/document/datasheet/CD00001322.pdf, Height=0.7mm, Manufacturer_Part_Number=BAT54KFILM, Mouser Price/Stock=https://www.mouser.co.uk/ProductDetail/STMicroelectronics/BAT54KFILM?qs=jZi1jxfVU95Y9ce6l3OT%252BA%3D%3D
D3: "Schottky Diode", Code_JEDEC=DO-214-AA, LatestRevisionDate=17-Jul-2002, LatestRevisionNote="Re-released for DXP Platform.", PackageDescription="DO-214-AA/SMB; 2 C-Bend Leads; Body 5.3 x 3.6 mm, inc. leads (LxW)", PackageReference=SMB, Published=8-Jun-2000, Publisher="Altium Limited"
IC1 IC2: "Integrated Circuit", Manufacturer_Name="Diodes Incorporated", Mouser Part Number=621-AP62250WU-7, Arrow Part Number=AP62250WU-7, Arrow Price/Stock=https://www.arrow.com/en/products/ap62250wu-7/diodes-incorporated?region=europe, Datasheet Link=https://www.diodes.com//assets/Datasheets/AP62250.pdf, Height=1mm, Manufacturer_Part_Number=AP62250WU-7, Mouser Price/Stock=https://www.mouser.co.uk/ProductDetail/Diodes-Incorporated/AP62250WU-7?qs=7MVldsJ5Uax1PUc8sdeimQ%3D%3D
IC3: "Integrated Circuit", Manufacturer_Name="Texas Instruments", Mouser Part Number=595-TPS259620DDAR, Arrow Part Number=TPS259620DDAR, Arrow Price/Stock=https://www.arrow.com/en/products/tps259620ddar/texas-instruments, Datasheet Link=https://www.ti.com/lit/gpn/TPS2596, Height=1.7mm, Manufacturer_Part_Number=TPS259620DDAR, Mouser Price/Stock=https://www.mouser.co.uk/ProductDetail/Texas-Instruments/TPS259620DDAR?qs=XeJtXLiO41RogCpRV1l%252BSg%3D%3D
IC4: "Integrated Circuit", Manufacturer_Name=STMicroelectronics, Mouser Part Number=511-ECMF02-2AMX6, Arrow Part Number=ECMF02-2AMX6, Arrow Price/Stock=https://www.arrow.com/en/products/ecmf02-2amx6/stmicroelectronics?utm_currency=USD&region=europe, Datasheet Link=http://www.st.com/content/ccc/resource/technical/document/datasheet/3a/28/cf/d0/31/63/48/8c/CD00282307.pdf/files/CD00282307.pdf/jcr:content/translations/en.CD00282307.pdf, Height=0.55mm, Manufacturer_Part_Number=ECMF02-2AMX6, Mouser Price/Stock=https://www.mouser.co.uk/ProductDetail/STMicroelectronics/ECMF02-2AMX6?qs=raAh8RbVwI65u5gmT42%2Flg%3D%3D
IC5: library part LT8364EMSE#PBF, "Integrated Circuit", Manufacturer_Name="Analog Devices", Mouser Part Number=584-LT8364EMSEPBF, Arrow Part Number=LT8364EMSE#PBF, Arrow Price/Stock=https://www.arrow.com/en/products/lt8364emsepbf/analog-devices?region=nac, Datasheet Link=https://www.analog.com/media/en/technical-documentation/data-sheets/lt8364.pdf, Height=1.1mm, Manufacturer_Part_Number=LT8364EMSE#PBF, Mouser Price/Stock=https://www.mouser.co.uk/ProductDetail/Analog-Devices/LT8364EMSEPBF?qs=W0yvOO0ixfH269lPR9cWrw%3D%3D
IC6: "Integrated Circuit", Manufacturer_Name=STMicroelectronics, Mouser Part Number=511-TCPP01-M12, Arrow Part Number=TCPP01-M12, Arrow Price/Stock=https://www.arrow.com/en/products/tcpp01-m12/stmicroelectronics?utm_currency=USD&region=nac, Datasheet Link=https://www.st.com/resource/en/datasheet/tcpp01-m12.pdf, Height=1mm, Manufacturer_Part_Number=TCPP01-M12, Mouser Price/Stock=https://www.mouser.co.uk/ProductDetail/STMicroelectronics/TCPP01-M12?qs=%252B6g0mu59x7KCafIwapwG2A%3D%3D
IC7: "Integrated Circuit", Manufacturer_Name=STMicroelectronics, Mouser Part Number=511-STM32G0B1CBT6, Arrow Part Number=STM32G0B1CBT6, Arrow Price/Stock=https://www.arrow.com/en/products/stm32g0b1cbt6/stmicroelectronics?utm_currency=USD&region=nac, Datasheet Link=https://www.st.com/resource/en/datasheet/stm32g0b1cb.pdf, Height=1.6mm, Manufacturer_Part_Number=STM32G0B1CBT6, Mouser Price/Stock=https://www.mouser.co.uk/ProductDetail/STMicroelectronics/STM32G0B1CBT6?qs=CiayqK2gdcKaQJ%2FcS3grXw%3D%3D
J1: Package=None, Availability=Unavailable, MF="{'manufacturer': u'GCT'}", MP=USB4105-GF-A, Price=None
L1 L2 L3: library part Inductor, "Inductor", Code_IEC=1005, Code_JEITA=0402, LatestRevisionDate=29-May-2009, LatestRevisionNote="IPC-7351 Footprint Added.", PackageDescription="Chip Inductor", PackageReference=0402-A, Published=8-Jun-2000, Publisher="Altium Limited"
MH1 MH2 MH3 MH4: library part MOUNT_HOLE_2MM_CORNER
P1: "Header, 3-Pin, Dual row", LatestRevisionDate=17-Jul-2002, LatestRevisionNote="Re-released for DXP Platform.", Publisher="Altium Limited"
Q1: "MOSFET (N-Channel)", Manufacturer_Name="Diodes Incorporated", Mouser Part Number=621-DMG6968UQ-7, Arrow Part Number=DMG6968UQ-7, Arrow Price/Stock=https://www.arrow.com/en/products/dmg6968uq-7/diodes-incorporated?region=asia, Datasheet Link=https://www.diodes.com//assets/Datasheets/products_inactive_data/DMG6968UQ.pdf, Height=1.1mm, Manufacturer_Part_Number=DMG6968UQ-7, Mouser Price/Stock=https://www.mouser.co.uk/ProductDetail/Diodes-Incorporated/DMG6968UQ-7?qs=MNIFWdyJgboErGB0%2FFpP4Q%3D%3D
Q2 Q3 Q4 Q9 Q10 Q11 Q12 Q13 Q18 Q19 Q24 Q25: library part NPN, "NPN Bipolar Transistor", Code_JEDEC=TO-226-AA, LatestRevisionDate=17-Jul-2002, LatestRevisionNote="Re-released for DXP Platform.", PackageDescription="TO, Flat Index; 3 In-Line, Axial Leads; Body Dia. 4.8mm; Leads 0.55 x 0.51 mm (max)", PackageReference=TO-226-AA, Published=8-Jun-2000, Publisher="Altium Limited"
Q5 Q6 Q7 Q8 Q14 Q15 Q16 Q17 Q20 Q21 Q22 Q23: library part PNP, "PNP Bipolar Transistor", LatestRevisionDate=29-May-2009, LatestRevisionNote="IPC-7351 Footprint Added.", PackageDescription="3-Pin SOT-23 Package 0.95 mm Pitch, 2.4 mm Lead Span", PackageReference=SOT-23B, PackageVersion=Aug-1999, Published=8-Jun-2000, Publisher="Altium Limited"
R1 R2 R3 R4 R5 R6 R7 R8 R9 R11 R12 R13 R14 R15 R16 R17 R18 R19 R20 R21 R22 R23 R24 R25 R26 R27 R28 R29 R30 R31 R32 R33 R34 R35 R36 R37 R38 R39 R40 R41 R42 R43 R44 R45 R46 R47 R48 R49 R50 R51 R52 R53 R54: library part Res2, "Resistor", LatestRevisionDate=17-Jul-2002, LatestRevisionNote="Re-released for DXP Platform.", PackageDescription="Axial Device, Thru-Hole; 2 Leads; 0.4 in Pin Spacing", PackageReference=AXIAL-0.4, Published=8-Jun-2000, Publisher="Altium Limited"
S1 S2 S3: "Switch (4-Pin Push)", Manufacturer_Name="C & K COMPONENTS", Manufacturer_Part_Number="PTS647SK70SMTR2N LFS", Datasheet Link=https://www.ckswitches.com/media/2567/pts647.pdf, Height=7mm
Y1: library part ABS06N-32.768kHz-T, "Crystal or Oscillator", Manufacturer_Name=ABRACON, Datasheet Link=https://abracon.com/datasheets/ABS06N.pdf, Height=0.6mm, Manufacturer_Part_Number=ABS06N-32.768kHz-T

## Via types
v1: diameter 0.6, hole 0.3, Top Layer to Bottom Layer, tented both sides, 61 vias
v2: diameter 0.7, hole 0.3, Top Layer to Bottom Layer, 42 vias
v3: diameter 0.65, hole 0.3, Top Layer to Bottom Layer, tented bottom, 32 vias
v4: diameter 0.75, hole 0.4, Top Layer to Bottom Layer, tented both sides, 25 vias
v5: diameter 0.6, hole 0.3, Top Layer to Bottom Layer, tented top, 6 vias
v6: diameter 0.5, hole 0.25, Top Layer to Bottom Layer, tented both sides, 6 vias
v7: diameter 0.5, hole 0.2, Top Layer to Bottom Layer, tented both sides, 4 vias
v8: diameter 0.5, hole 0.3, Top Layer to Bottom Layer, tented both sides, 4 vias
v9: diameter 0.7, hole 0.4, Top Layer to Bottom Layer, tented both sides, 4 vias
v10: diameter 0.55, hole 0.3, Top Layer to Bottom Layer, tented both sides, 4 vias

## Nets (pads, with @x,y where several pads share a name; then routed paths per layer and width w, separated by ;. In a path a pad name is that pad's centre, name@x,y a point inside that pad or via, vN(x,y) a via of type N, cw(c..) or ccw(c..) an arc to the next point about the centre after c; other vN are vias at no path point)
+1V: C10.2 C11.2 L2.2 R4.2 V1.8 V2.8 V3.8 V4.8 | length 11.9
  L2 w0.254: v10(19.634,31.958) 25.202,31.958 26.396,33.153 26.396,34.245 v1(27.711,35.56)
  Bottom Layer w0.254: R4.2@27.183,37 27.183,36.089 v1(27.711,35.56)
  other v10: 18.813,31.958 18.813,32.898 19.634,32.898
+3V3: C8.2 C9.2 C24.2 C25.2 C28.2 C29.2 IC7.6 L1.2 P1.6 R5.2 R52.2 R53.2 R54.2 | length 36.8
  Top Layer w0.254: R53.2@44.8,13.4 R53.2@44.85,13.4 ; R54.2@44.8,14.9 44.85,14.9 45.073,15.123 45.073,15.173 45.44,15.54 45.592,15.54 v1(45.658,15.606) ; R52.2@44.85,12.1 R53.2@44.85,13.4 ; R54.2@44.85,14.75 R53.2@44.85,13.5 R53.2@44.85,13.4 ; v9(45.4,7.6) C29.2@46.5,7.6 ; v8(45.6,13.4) R53.2@44.85,13.4
  L2 w0.254: v1(9.246,33.122) 10.439,34.315 15.545,34.315 v4@17.043,35.814
  Bottom Layer w0.254: R5.2@16.84,37.363 16.84,36.126 17.018,35.948 v4(17.018,35.814) ; IC7.6@45.25,9.062 IC7.6@45.273,9.039 ; v1(45.658,15.606) 45.712,15.66 47.26,15.66 49.9,18.3 49.9,28.06 P1.6@53.7,31.86
  other v1: 7.696,32.41 8.458,32.41 9.246,32.41 7.722,33.122 8.509,33.122